# Altium PCB Rackmount_DSP.PcbDoc (part 7 of 24)
Units mil, origin at the board's own origin, x right, y up, seen from the top; angles counter-clockwise.
Board outline 10629.92 x 8267.72 mil, 4 copper layers (Top Layer, Mid Layer 1, Mid Layer 2, Bottom Layer), stack 36.2 mil thick; 4500 components, 1565 nets, 9765 pads, 3289 vias.
Unrouted connection lines stored in the file: 1.
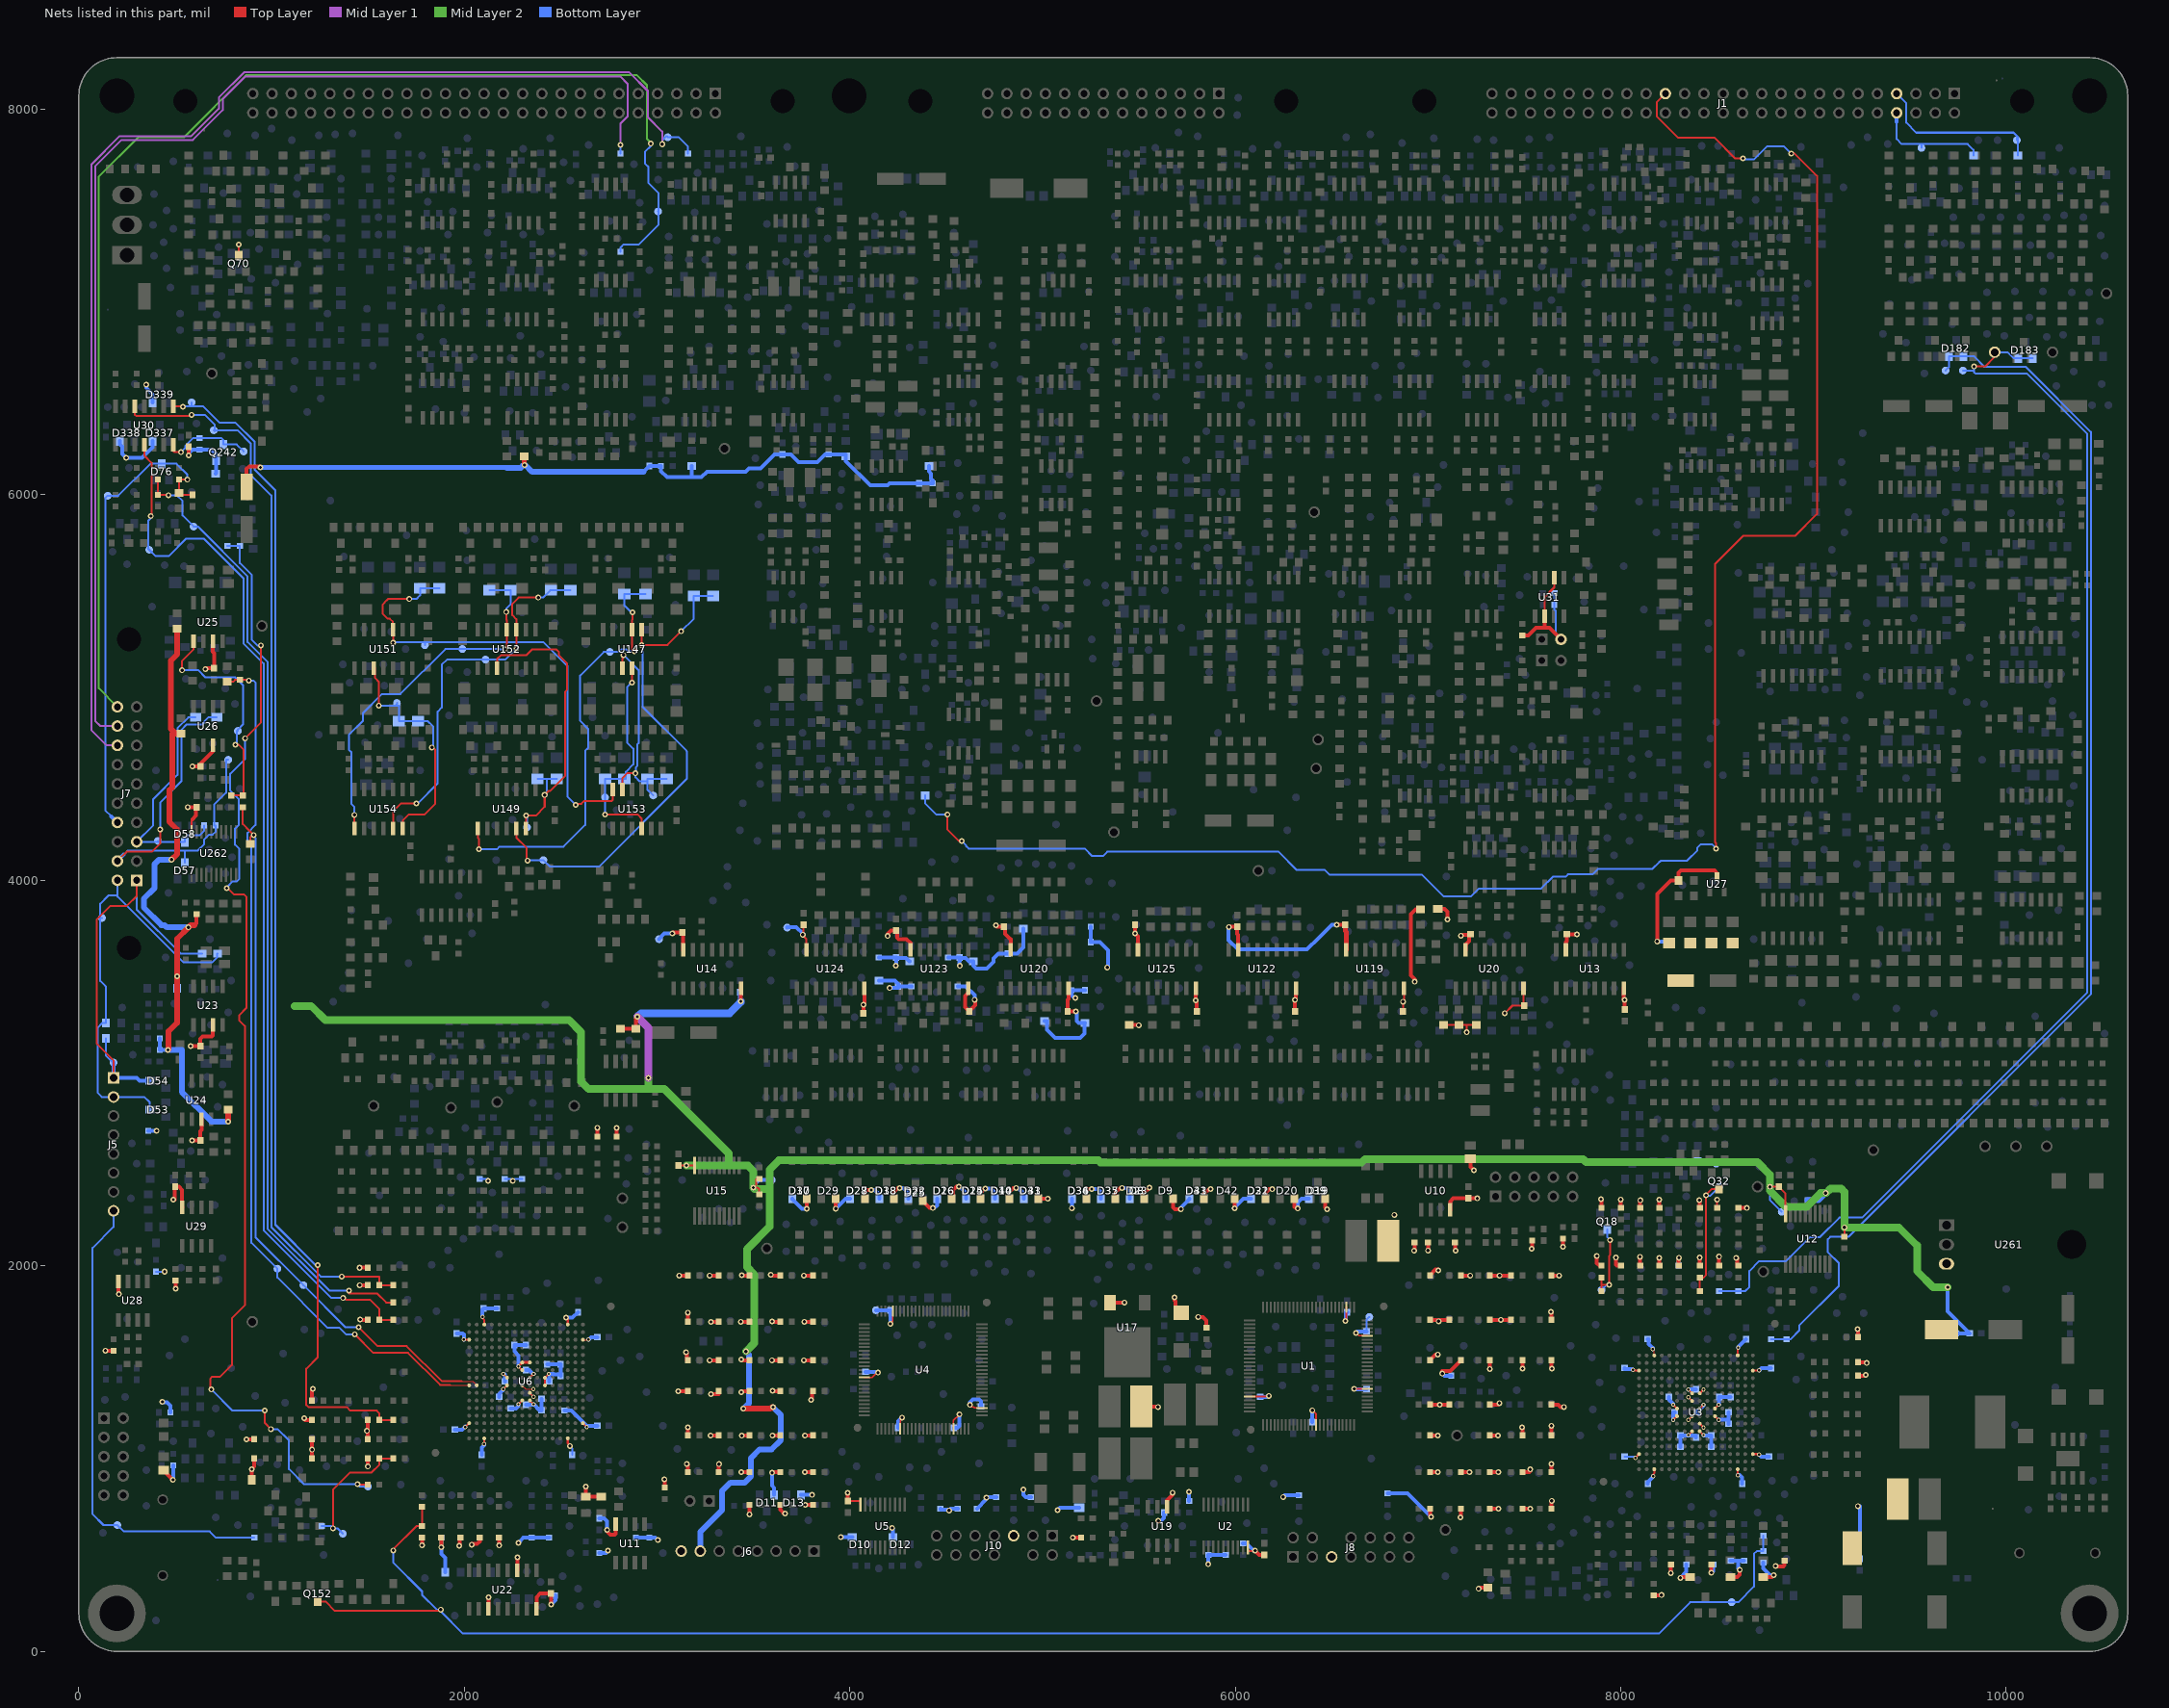
[diagram p9: the nets of this part, all layers, seen from the top]

## Via types
v1: diameter 30, hole 16, Top Layer to Bottom Layer, 3143 vias
v2: diameter 22, hole 12, Top Layer to Bottom Layer, 146 vias

## Nets (pads, with @x,y where several pads share a name; then routed paths per layer and width w, separated by ;. In a path a pad name is that pad's centre, name@x,y a point inside that pad or via, vN(x,y) a via of type N, cw(c..) or ccw(c..) an arc to the next point about the centre after c; other vN are vias at no path point) (continued)
+3.3V: C22.1 C23.1 C24.1 C25.1 C27.1 C28.1 C29.1 C220.1 C225.1 C226.1 C227.1 C228.1 C229.1 C230.1 C231.1 C232.1 C238.1 C239.1 C243.1 C244.1 C245.1 C246.1 C250.1 C256.1 C257.1 C259.1 C260.1 C261.1 C262.1 C263.1 C264.1 C265.1 C266.1 C267.1 C268.1 C269.1 C270.1 C271.1 C272.1 C273.1 C274.1 C275.1 C279.1 C280.1 C281.1 C282.1 C284.1 C285.1 C286.1 C287.1 C291.1 C292.1 C293.1 C295.1 C298.1 C299.1 C303.1 C306.1 C307.1 C498.1 C1145.1 D4.1 D8.2 D9.2 D10.2 D11.2 D12.2 D13.2 D14.2 D15.2 D16.2 D17.2 D18.2 D19.2 D20.2 D21.2 D22.2 D23.2 D24.2 D25.2 D26.2 D27.2 D28.2 D29.2 D30.2 D31.2 D32.2 D33.2 D34.2 D35.2 D36.2 D37.2 D38.2 D39.2 D40.2 D41.2 D42.2 D43.2 D47.2 D48.2 D51.2 D52.2 D67.2 D68.2 J6.8 J8.5 J10.5 L1.1 L5.1 L6.2 L7.1 L8.1 L9.1 R19.1 R21.1 R22.1 R23.1 R24.1 R26.2 R27.2 R28.2 R29.2 R30.2 R31.2 R32.2 R33.2 R34.2 R35.2 R36.2 R37.2 R38.2 R39.2 R40.2 R41.2 R42.2 R43.2 R44.2 R45.2 R46.2 R47.2 R48.2 R49.2 R50.2 R51.2 R52.2 R53.2 R54.2 R55.2 R56.2 R57.2 R58.2 R59.2 R60.2 R627.1 R629.1 R630.1 R631.2 R633.1 R634.1 R661.1 R662.1 R663.1 R664.2 R665.1 R666.1 R667.1 R668.2 R669.2 R670.2 R671.2 R672.1 R673.2 R674.1 R675.2 R678.1 R679.2 R681.1 R682.2 R683.1 R684.1 R685.2 R686.1 R687.2 R688.2 R689.1 R691.1 R692.2 R693.2 R694.1 R703.1 R704.1 R705.2 R708.2 R709.2 R710.2 R712.1 R714.2 R715.1 R716.1 R718.1 R719.2 R720.2 R721.1 R722.1 R723.1 R724.1 R725.2 R727.1 R731.2 R732.2 R739.2 R740.1 R741.2 R744.1 R745.1 R746.1 R747.2 R748.1 R749.1 R750.1 R752.2 R754.1 R756.2 R757.1 R758.2 R759.1 R764.1 R765.1 R766.1 R767.1 R768.1 R769.1 R770.1 R771.1 R772.1 R773.1 R774.1 R775.1 R776.1 R777.1 R778.1 R779.1 R780.1 R781.1 R783.1 R784.1 R785.1 R786.1 R787.1 R788.1 R789.1 R790.1 R791.1 R792.1 R793.1 R841.1 R842.1 R843.1 R844.1 R855.1 R856.1 R857.1 R864.2 R865.2 R866.1 R869.1 R1345.1 R2720.1 R3009.2 R3010.2 R3015.2 R3016.2 TP1731.1 TP1757.1 U1.3 U1.46 U1.65 U1.82 U1.96 U2.20 U3.A3 U3.A14 U3.C1 U3.C16 U3.F8 U3.F9 U3.H6 U3.H8 U3.H10 U3.H11 U3.J6 U3.J7 U3.J9 U3.J11 U3.L8 U3.L9 U3.P1 U3.P16 U3.T3 U3.T14 U4.3 U4.46 U4.65 U4.82 U4.96 U5.20 U6.A3 U6.A14 U6.C1 U6.C16 U6.F8 U6.F9 U6.H6 U6.H8 U6.H10 U6.H11 U6.J6 U6.J7 U6.J9 U6.J11 U6.L8 U6.L9 U6.P1 U6.P16 U6.T3 U6.T14 U10.8 U11.8 U17.3 U19.2 U22.3 U22.11 U22.16 U28.8 U29.8 | length 22248
  Top Layer w6: U6.J9@2300.32,1380.32 2300.32,1379.31 2319,1360.63 v2(2358.18,1360.63) ; U6.A3@2615.28,1616.54 2634.28,1616.54 2634.66,1616.92 v2(2644.64,1616.92) ; v2(8166.59,1567.37) 8165.83,1567.37 8168.99,1570.53 8173.46,1566.05 U3.P1@8173.46,1535.28
  Top Layer w9: U4.65@4074.88,1420.63 4114.01,1420.63 4139.14,1445.76 v1(4145.87,1445.76) ; v1(4210,1699.39) 4222.52,1711.91 U4.46@4222.52,1765.12 ; U4.82@4261.89,1154.88 4261.89,1203.72 v1(4271.02,1212.85) ; U4.96@4537.48,1154.88 4537.48,1197.5 v1(4569.01,1229.03) ; v1(4622.45,1278.29) 4622.45,1272.02 4626.67,1267.79 4642.7,1267.79 4647.35,1263.15 U4.3@4685.12,1263.15 ; U1.46@6074.88,1322.52 6170.62,1322.52 v1(6173.51,1325.4) ; v1(6399.7,1250.26) 6419.37,1230.59 U1.65@6419.37,1174.88 ; v1(6570.51,1713.86) 6576.85,1720.2 U1.3@6576.85,1785.12 ; v1(6616.93,1361.89) U1.82@6685.12,1361.89 ; v1(6626.41,1652.01) 6640.94,1637.48 U1.96@6685.12,1637.48
  Top Layer w10: v2(1997.33,1616.91) 2003.35,1616.91 2003.72,1616.54 U6.T3@2024.72,1616.54 ; v2(2005.04,1163.78) U6.T14@2024.72,1183.46 ; v2(2093.81,1735.91) 2093.81,1728.1 2103.46,1718.44 U6.P1@2103.46,1695.28 ; v2(2102.68,1076.2) 2102.68,1082.94 2103.46,1083.72 U6.P16@2103.46,1104.72 ; v2(2201.89,1360.63) U6.L9@2221.57,1380.32 ; v2(2201.89,1439.37) U6.L8@2221.57,1419.68 ; v2(2280.63,1281.89) U6.J11@2300.32,1301.57 ; v2(2280.63,1478.74) U6.J7@2300.32,1459.06 ; U6.H11@2339.68,1301.57 v2(2359.37,1281.89) ; U6.H10@2339.68,1340.94 v2(2359.37,1321.26) ; U6.H8@2339.68,1419.68 v2(2359.37,1439.37) ; U6.F9@2418.43,1380.32 U6.F8@2418.43,1419.68 v2(2438.11,1439.37) ; v1(2527.69,1731.43) 2536.54,1722.58 U6.C1@2536.54,1695.28 ; U6.A14@2615.28,1183.46 v2(2634.96,1163.78) ; C246.1@3990,780 4054.84,780 U5.20@4054.84,761.61 ; U2.20@6065.16,538.39 6065.16,519.11 6102.46,519.11 v1(6102.46,522.08) ; v1(7897.6,2345.88) v1@7900,2345.88 ; v2(8062.85,1461.16) 8069.1,1461.16 8073.72,1456.54 U3.T3@8094.72,1456.54 ; v2(8075.04,1003.78) U3.T14@8094.72,1023.46 ; v2(8167.38,909.5) 8169.79,911.92 8169.79,920.05 8173.46,923.72 U3.P16@8173.46,944.72 ; v2(8271.89,1200.63) U3.L9@8291.57,1220.32 ; v2(8271.89,1279.37) U3.L8@8291.57,1259.68 ; v2(8350.63,1121.89) U3.J11@8370.32,1141.57 ; v2(8350.63,1200.63) U3.J9@8370.32,1220.32 ; v2(8350.63,1318.74) U3.J7@8370.32,1299.06 ; v2(8350.63,1358.11) U3.J6@8370.32,1338.43 ; v1@8406.56,2340.27 v1(8407.83,2340.27) ; U3.H11@8409.68,1141.57 v2(8429.37,1121.89) ; U3.H10@8409.68,1180.94 v2(8429.37,1161.26) ; U3.H8@8409.68,1259.68 v2(8429.37,1279.37) ; U3.H6@8409.68,1338.43 v2(8429.37,1358.11) ; U3.F9@8488.43,1220.32 v2(8508.11,1200.63) ; U3.F8@8488.43,1259.68 v2(8508.11,1279.37) ; R720.2@8500,2300 v1(8500,2343.54) ; U3.C16@8606.54,944.72 8606.54,923.72 8606.94,923.32 v2(8606.94,914.42) ; U3.C1@8606.54,1535.28 8606.54,1575.14 v2(8609.22,1575.14) ; U3.A14@8685.28,1023.46 8706.28,1023.46 8709.4,1020.34 v2(8717.68,1020.34) ; U3.A3@8685.28,1456.54 8706.28,1456.54 8707.41,1457.67 v2(8717.92,1457.67)
  Top Layer w12: U6.C16@2536.54,1104.72 2536.54,1080.17 2540.78,1075.92 v1@2542.99,1075.92 ; v1@2542.99,1075.93 2547.28,1071.64 v1(2547.28,1065.82)
  Top Layer w15: v2(2280.63,1478.74) U6.J6@2300.32,1498.43 U6.H6@2339.68,1498.43
  Top Layer w20: v1(138.39,1560) R633.1@180,1560 ; U28.8@205,1920 205,1852.65 v1(207.57,1852.65) ; L8.1@440,940.5 440,938.42 487.92,890.5 v1(488.44,889.98) ; v1(489.88,2343.7) 497.7,2343.7 497.7,2410 C282.1@500,2410 519.92,2410 535.61,2394.31 535.61,2305.13 U29.8@536.63,2304.11 ; v1(501.63,1881.7) R634.1@501.63,1924.11 ; 600.55,3767.93 610,3777.38 R2720.1@610,3825 ; v1(869.36,1100.01) R678.1@910,1100 ; D48.2@896.5,890 v1(896.5,945.08) 910,958.58 R630.1@910,1000 ; v1(1169.34,1209.88) 1169.34,1205.66 1175,1200 R744.1@1210,1200 ; R694.1@1210,1000 v1(1210,1046.17) R740.1@1210,1100 ; R745.1@1210,1300 1210,1357.86 v1(1214.39,1362.25) ; v1(1455.98,1990) R727.1@1500,1990 ; v1(1457.44,1900) R665.1@1500,1900 ; v1(1459.64,1721) 1460.64,1720 R666.1@1500,1720 ; v1(1499.83,958.7) 1500,958.88 R721.1@1500,1000 ; R754.1@1500,1100 1500,1138.37 v1(1494.7,1143.67) 1500,1148.97 R667.1@1500,1200 ; v1(1780,549.79) R674.1@1780,590 ; v1(1880,539.98) R723.1@1880,590 ; v1(1973.78,547.46) 1973.78,554.04 1974.67,554.94 1974.67,590 R672.1@1980,590 ; v1(2038.21,553.57) 2038.21,556.96 2066.46,556.96 2080,570.51 R686.1@2080,590 ; U22.11@2125,220 v1(2125,280.95) ; v1(2180,549.15) R684.1@2180,590 ; U22.3@2275,420 v1(2275,487.5) ; U22.16@2375,220 2375,281.1 2393.9,300 C299.1@2450,300 2450.45,299.55 v1(2450.45,242.79) ; v1(2630,855.5) D68.2@2630,803.5 D52.2@2710,803.5 ; R683.1@2690,2670 v1(2690,2716.64) ; v1(2741.24,629.88) 2741.24,621.75 2757.63,605.35 2779.4,605.35 2785,610.95 U11.8@2785,660 ; R661.1@2790,2670 v1(2790,2715.9) ; v1(3038.5,891.84) 3040,890.34 R712.1@3040,850 ; v1(3109.91,1350) R779.1@3160,1350 ; v1(3114.55,1950) R792.1@3160,1950 ; v1(3150.89,1551.12) 3150.89,1550.19 3155,1546.08 3155,1510 R780.1@3160,1510 ; v1(3153.76,972.52) 3153.76,972.24 3160,966 R785.1@3160,930 ; R769.1@3160,1120 v1(3160,1162.21) ; R842.1@3160,1710 v1(3160,1757.36) ; v1(3272.87,1950) R786.1@3320,1950 ; v1(3273.22,1510) R783.1@3320,1510 ; v1(3278.04,1120) R855.1@3320,1120 ; v1(3279.16,1334.75) 3318.62,1334.75 3320,1336.13 R767.1@3320,1350 ; v1(3279.78,1708.99) 3280.79,1710 R788.1@3320,1710 ; R857.1@3320,930 3320,970.03 v1(3321.01,971.04) ; v1(3435.02,1710) R791.1@3480,1710 ; v1(3436.44,1345.02) 3435.82,1345.02 3435.82,1350 R775.1@3480,1350 ; v1(3436.65,930) R781.1@3480,930 ; v1(3436.87,1513.62) 3440.49,1510 R776.1@3480,1510 ; v1(3439.7,1950.96) 3440.66,1950 R841.1@3480,1950 ; v1(3439.94,1118.76) 3441.18,1120 R766.1@3480,1120 ; v1(3480,710.89) R774.1@3480,760 ; v1(3590.36,1954.37) 3594.73,1950 R790.1@3640,1950 ; v1(3595.96,1510) R773.1@3640,1510 ; v1(3596.45,926.19) 3600.26,930 R768.1@3640,930 ; v1(3597.26,1711.38) 3598.64,1710 R784.1@3640,1710 ; v1(3597.98,1120) R856.1@3640,1120 ; v1(3599.47,1352.07) 3601.54,1350 R777.1@3640,1350 ; R789.1@3640,760 3640,734.11 3655.37,718.73 3663.65,718.73 v1(3663.65,715.39) ; v1(3761.02,1510) R770.1@3810,1510 ; v1(3761.44,1950) R778.1@3810,1950 ; v1(3763.38,1710) R787.1@3810,1710 ; v1(3767.22,930) R771.1@3810,930 ; v1(3767.59,1120) R765.1@3810,1120 ; v1(3769.05,759.56) 3769.48,760 R793.1@3810,760 ; v1(3775.9,2295.33) 3777.5,2296.94 D30.2@3777.5,2348.5 ; v1(3799.22,1304.41) 3799.22,1308.22 3805,1314 3805,1350 R772.1@3810,1350 ; v1(3927.5,2296.8) D29.2@3927.5,2348.5 ; v1(3989.34,823.02) 3989.34,818.16 3990,817.5 C246.1@3990,780 ; D28.2@4077.5,2348.5 4077.5,2380.98 4090.01,2393.49 v1(4111.59,2393.49) ; D18.2@4227.5,2348.5 4227.5,2380.92 4249.59,2403.01 v1(4259.19,2403.01) ; D25.2@4377.5,2338.5 4377.5,2335 4412.77,2299.73 v1(4430.6,2299.73) ; D16.2@4527.5,2348.5 4527.5,2352 4535.84,2360.34 4535.84,2393.27 4553.27,2410.7 v1(4565.02,2410.7) ; D24.2@4677.5,2348.5 4677.5,2378.37 4699.21,2400.08 v1(4702.37,2400.08) ; D14.2@4827.5,2348.5 4827.5,2383.87 4848.11,2404.48 v1(4862.79,2404.48) ; D41.2@4977.5,2348.5 v1(5026.9,2348.5) ; v1(5156.77,590) R663.1@5200,590 ; D36.2@5227.5,2348.5 5227.5,2390.42 5235.36,2398.28 v1(5255.52,2398.28) ; U17.3@5350,1810.1 v1(5425.08,1810.1) ; D37.2@5377.5,2348.5 5377.5,2379.69 5401.95,2404.14 v1(5412.28,2404.14) ; L5.1@5512.68,1270 5596.29,1270 v1(5598.45,1267.84) ; D23.2@5527.5,2348.5 5527.5,2377.52 5555.35,2405.38 v1(5555.12,2405.61) ; U19.2@5645,750 5645,781.41 5674.91,811.32 v1(5674.91,823.33) ; D9.2@5677.5,2348.5 5677.5,2303.88 5687.11,2294.27 v1(5718.11,2294.27) ; v1(5685.3,1837.06) 5685.3,1820.57 5690,1815.87 5690,1757.5 D4.1@5720,1757.5 ; v1(5807.76,1734.97) 5831.08,1734.97 5850,1716.06 R865.2@5850,1680 ; D43.2@5837.5,2348.5 5837.5,2372.6 5863.55,2398.65 v1(5871.96,2398.65) ; v1(5997.5,2298.29) D42.2@5997.5,2348.5 ; v1(6102.46,522.08) 6124.54,500 C303.1@6150,500 ; D21.2@6157.5,2348.5 6157.5,2378.96 6176.09,2397.55 v1(6190.97,2397.55) ; D20.2@6307.5,2348.5 6307.5,2305 6315.3,2297.2 v1(6323.92,2297.2) ; D19.2@6467.5,2348.5 6467.5,2302.69 v1(6476.65,2293.53) ; v1(6927.54,2079.32) 6930,2081.78 R58.2@6930,2120 ; v1(7000,2079.84) R59.2@7000,2120 ; R60.2@7010,740 7010,703.02 v1(7015.26,697.76) ; R42.2@7010,930 v1(7051.24,930) ; R32.2@7010,1120 v1(7051.13,1120) ; R35.2@7010,1280 v1(7060.21,1280) R46.2@7110,1280 ; R50.2@7010,1510 7010,1511 7039.14,1540.14 7049.93,1540.14 v1(7050.07,1540) ; R51.2@7010,1720 v1@7057.37,1720 ; R41.2@7010,1950 7010,1951 7039.14,1980.14 7049.51,1980.14 v1(7053.05,1976.6) ; v1(7054.78,1712.51) 7057.39,1712.51 7057.39,1720.02 R54.2@7110,1720 ; v1(7074.02,1440.91) 7074.02,1454.31 7115.31,1454.31 7170,1509 R53.2@7170,1510 ; U10.8@7115,2290 7115,2333.75 7131.25,2350 C292.1@7210,2350 v1(7255.43,2350) ; R752.2@7140,2120 7140,2082.01 v1(7143.04,2078.97) ; v1(7168.64,694.67) 7170,696.03 R27.2@7170,740 ; R30.2@7170,930 v1(7214.63,930) ; R40.2@7170,1950 v1(7218.96,1950) ; L7.1@7220,2555.5 7220,2513.5 v1(7238.42,2495.14) v1(7238.42,2495.14) ; v1(7261.78,324.58) 7267.19,330 R864.2@7310,330 ; R28.2@7320,740 v1(7364.74,740) ; R43.2@7320,930 v1(7364.39,930) ; R45.2@7320,1120 v1(7362.32,1120) ; R36.2@7320,1280 7363.12,1280 v1(7371.07,1287.96) ; v1(7320,1465.38) R49.2@7320,1510 ; R39.2@7320,1720 v1(7377.78,1720) R52.2@7430,1720 ; R57.2@7320,1950 v1(7371.44,1950) R56.2@7430,1950 ; v1(7487.25,1162.19) 7490,1159.44 R33.2@7490,1120 ; R26.2@7490,740 v1(7530.65,740) ; R31.2@7490,930 7525,930 7530.2,935.2 v1(7530.2,943.84) ; v1(7490,1467.46) R48.2@7490,1510 ; v1(7537.64,2088.72) 7540,2091.08 R748.1@7540,2130 ; v1(7638.33,1761.14) 7640,1759.47 R38.2@7640,1720 ; R29.2@7640,740 7640,779.21 v1(7641.85,781.06) ; R44.2@7640,930 v1(7640,971.79) ; R34.2@7640,1120 v1(7640,1170.49) ; R47.2@7640,1280 7675.93,1280 7688.16,1267.77 v1(7704.48,1267.77) ; R37.2@7640,1510 7640,1468.94 v1(7642.35,1466.59) ; R55.2@7640,1950 7680.61,1950 v1(7680.68,1949.93) ; v1(7700,2099.02) R704.1@7700,2140 ; v1(7875.86,2051.36) 7875.86,2014.71 7890.56,2000 R725.2@7900,2000 ; R732.2@7900,2300 v1@7900,2345.88 ; v1(7974.51,2042.82) 7974.51,2042.34 7975.23,2041.63 7975.23,2005.56 7980.79,2000 R669.2@8000,2000 ; R670.2@8000,2300 v1(8000,2344.49) ; R671.2@8100,2000 v1(8100,2047.28) ; R668.2@8100,2300 8100,2340.04 v1(8100.97,2340.04) ; R688.2@8170,290 8208.94,290 v1(8211.06,292.12) ; R664.2@8200,2000 v1(8200,2041.6) ; R756.2@8200,2300 v1(8200,2344.03) ; v1(8260,406.2) R682.2@8260,450 ; R709.2@8300,2000 8300,2039.53 v1(8302.62,2042.15) ; v1(8308.97,381.51) 8313.95,386.5 D67.2@8360,386.5 ; v1@8406.56,2340.27 8410,2336.83 R708.2@8410,2300 ; R741.2@8410,2000 v1(8410,2042.73) ; v1(8470,407.91) R679.2@8470,450 ; R705.2@8510,2000 v1(8510,2047.82) ; D51.2@8570,386.5 8605.25,386.5 8617.58,398.82 v1(8617.58,422.8) ; v1(8598.29,2040.98) 8598.29,2040.16 8603.45,2035 8603.45,2000 R692.2@8610,2000 ; R719.2@8610,2300 v1(8654.76,2300) ; D47.2@8740,386.5 8783.49,386.5 v1(8792.71,395.72) ; v1(8802.74,442.49) 8804.38,440.86 8843.02,440.86 8850,447.84 R693.2@8850,470 ; v1(9228.47,1671.11) 9230,1669.58 R710.2@9230,1630 ; R747.2@9230,1430 9266.31,1430 v1(9271,1434.69) ; R758.2@9230,1500 9271.49,1500 v1(9275.55,1495.94)
  Top Layer w30: v1(462.53,3120) 464.86,3122.33 464.86,3216.27 509.73,3261.13 v1@509.73,3502.36 ; v1(481.04,4107.33) 509.77,4136.06 509.77,4263.84 470.11,4303.5 470.11,4467.86 485.4,4483.15 485.4,4760 502.74,4760 ; v1(510,3502.36) v1@509.73,3502.36 ; R3016.2@510,5305 510,5172.06 478.28,5140.34 478.28,4785.04 502.74,4760.58 502.74,4760 ; R3015.2@530,4760 502.74,4760 ; 600.55,3767.93 580.48,3767.93 v1(568.52,3755.98) 509.73,3697.18 v1@509.73,3502.36 ; v1(775,2748.41) R3009.2@775,2810
  Bottom Layer w9: v1@6167.4,1325.4 v1(6173.51,1325.4)
  Bottom Layer w10: R631.2@400,1970 v1(444.62,1970) ; R724.1@2080,2450 2123.04,2450 v1(2123.04,2440.27) ; v2(2093.81,1735.91) v2@2094.14,1736.24 ; R722.1@2210,2450 2242.37,2450 v1(2251.41,2440.96) 2260.46,2450 R757.1@2300,2450 ; v1(2547.28,1065.82) 2560,1053.09 C268.1@2560,1020 ; C24.1@6680,1660 6680,1720 TP1757.1@6695,1735 ; C238.1@8020,1010 8068.82,1010 v2(8075.04,1003.78)
  Bottom Layer w20: R866.1@420,3180 R869.1@420,3120 v1(462.53,3120) ; v1(433.5,1294.81) 433.5,1292.45 457.06,1292.45 475,1274.52 R749.1@475,1240 ; v1(488.44,889.98) 490,891.54 R691.1@490,965 ; R703.1@1880,590 v1(1880,539.98) 1880,504.98 1900,484.98 R1345.1@1900,410 ; C285.1@1950,1150 1987.5,1150 2005.04,1167.54 v2(2005.04,1163.78) ; C287.1@1960,1650 1991.39,1650 1997.33,1644.06 v2(1997.33,1616.91) ; C269.1@2090,1020 2090,1057.5 2102.68,1070.18 v2(2102.68,1076.2) ; v2@2094.14,1736.24 2094.14,1774.14 C274.1@2100,1780 R662.1@2170,1780 ; C279.1@2180,1320 2180,1333.89 2201.75,1355.64 2201.75,1360.49 v2(2201.89,1360.63) ; v2(2201.89,1439.37) 2206.63,1439.37 2210,1436 C266.1@2210,1400 ; C272.1@2240,1260 2240,1259.36 2266.98,1259.36 2280.63,1273.01 v2(2280.63,1281.89) ; v1(2280,563.28) 2306.72,590 R681.1@2350,590 R689.1@2440,590 ; v2(2280.63,1478.74) 2280.63,1535.3 2260,1555.93 C271.1@2260,1590 C273.1@2320,1590 ; C244.1@2320,1280 2357.48,1280 v2(2359.37,1281.89) 2391.26,1250 C239.1@2400,1250 C280.1@2400,1310 ; C270.1@2320,1460 2334.65,1460 2355.28,1439.37 v2(2359.37,1439.37) ; C306.1@2430,1490 C307.1@2500,1490 C250.1@2500,1437.5 ; C245.1@2440,1400 2440,1437.48 v2(2438.11,1439.37) 2462.13,1439.37 2464,1437.5 C250.1@2500,1437.5 ; v1(2450.45,242.79) 2472.26,264.6 2472.26,290 R764.1@2470,290 ; C250.1@2500,1430 C250.1@2500,1437.5 ; R714.2@2520,1250 2556,1250 2633.52,1172.48 2633.52,1165.22 v2(2634.96,1163.78) 2641.18,1170 C284.1@2690,1170 ; v1(2527.69,1731.43) 2561.43,1731.43 C286.1@2590,1760 ; v2(2644.64,1616.92) 2657.3,1629.57 2690,1629.57 C293.1@2690,1630 ; R750.1@2700,510 2736,510 2745.51,519.51 v1(2745.51,522.22) ; C243.1@2700,690 2725.59,690 2741.24,674.36 v1(2741.24,629.88) ; R843.1@2890,590 R844.1@2960,590 2989.43,590 3001.99,577.44 v1(3003.67,577.44) ; v1(3596.45,926.19) 3596.45,859.67 3607.5,848.62 D11.2@3607.5,811.5 ; D17.2@3702.5,2348.5 3702.5,2345.54 3752.71,2295.33 v1(3775.9,2295.33) ; D13.2@3747.5,811.5 v1(3804.41,811.5) ; v1(3927.5,2296.8) 3930.2,2299.5 3930.62,2299.5 3930.62,2300.27 3978.85,2348.5 D27.2@4002.5,2348.5 ; v1(3952.9,592.5) D10.2@4013.5,592.5 ; C225.1@4080,1450 4141.63,1450 v1(4145.87,1445.76) ; v1(4111.59,2393.49) 4128.7,2393.49 4152.5,2369.69 D38.2@4152.5,2348.5 ; TP1731.1@4135,1770 C29.1@4210,1770 v1(4210,1699.39) ; v1(4219.44,640.04) 4223.5,635.98 D12.2@4223.5,592.5 ; C267.1@4250,1160 4250,1194.95 4267.9,1212.85 v1(4271.02,1212.85) ; v1(4259.19,2403.01) 4279.24,2403.01 4302.5,2379.76 D22.2@4302.5,2348.5 ; v1(4430.6,2299.73) 4438.21,2299.73 4452.5,2314.01 D26.2@4452.5,2348.5 ; R629.1@4470,740 4470,735 4506,735 4510.13,730.87 v1(4514.79,730.87) 4514.87,730.87 4524,740 R627.1@4560,740 ; C28.1@4540,1160 4558.41,1160 4569.01,1170.6 v1(4569.01,1229.03) ; v1(4565.02,2410.7) 4569.91,2410.7 4602.5,2378.11 D15.2@4602.5,2348.5 ; v1(4622.45,1278.29) 4622.45,1292.11 4637.43,1307.09 4669.84,1307.09 4680,1296.93 C27.1@4680,1270 ; R715.1@4660,740 4709,789 v1(4709,797.07) 4711.93,800 R716.1@4760,800 ; v1(4702.37,2400.08) 4734.31,2400.08 4752.5,2381.89 D40.2@4752.5,2348.5 ; v1(4862.79,2404.48) 4872.78,2404.48 4902.5,2374.76 D33.2@4902.5,2348.5 ; v1(4901.1,838.9) 4901.1,811.84 4912.94,800 R718.1@4940,800 ; v1(5077.39,732.97) 5089.92,745.5 L9.1@5190,745.5 ; v1(5151.42,2299.64) 5152.5,2300.72 D34.2@5152.5,2348.5 ; v1(5255.52,2398.28) 5287.43,2398.28 5302.5,2383.21 D35.2@5302.5,2348.5 ; v1(5412.28,2404.14) 5433.58,2404.14 5452.5,2385.23 D8.2@5452.5,2348.5 ; v1(5600.7,676.97) 5614.15,676.97 5630,692.82 C498.1@5630,720 ; v1(5718.11,2294.27) 5718.11,2300.61 5762.5,2345 D31.2@5762.5,2348.5 ; R759.1@5760,780 v1(5760,827.68) ; v1(5860,451.59) R21.1@5860,500 R22.1@5950,500 ; v1(5997.5,2298.29) 5992.29,2298.29 6042.5,2348.5 D32.2@6082.5,2348.5 ; R23.1@6040,560 6057.51,560 6095.42,522.08 v1(6102.46,522.08) ; C23.1@6130,1320 6162,1320 v1@6167.4,1325.4 ; v1(6247.89,800.71) 6257.18,810 R19.1@6330,810 ; v1(6323.92,2297.2) 6323.92,2329.25 6343.17,2348.5 D39.2@6382.5,2348.5 ; v1(6399.7,1250.26) 6399.7,1227.8 6400,1227.5 C22.1@6400,1190 ; v1(6570.51,1713.86) 6574,1717.35 6574,1760 C25.1@6580,1760 ; v1(6616.93,1361.89) 6618.82,1360 C220.1@6680,1360 ; v1(6626.41,1652.01) 6634.4,1660 C24.1@6680,1660 ; R24.1@6790,820 6893.02,820 v1(7015.26,697.76) ; v1(7074.02,1440.91) 7084.93,1430 R746.1@7120,1430 ; C227.1@8020,1470 8020,1464 8060.01,1464 v2(8062.85,1461.16) ; C265.1@8140,870 8140,877.03 8167.38,904.41 v2(8167.38,909.5) ; C261.1@8140,1620 8145.73,1620 8145.73,1593.79 8165.83,1573.68 8165.83,1567.37 v2(8166.59,1567.37) ; C281.1@8250,1320 8250,1305.99 8271.89,1284.1 v2(8271.89,1279.37) ; v2(8271.89,1200.63) 8272.5,1201.24 8272.5,1240 C256.1@8280,1240 ; R739.2@8300,2000 8300,2039.53 v1(8302.62,2042.15) ; v1(8308.97,381.51) 8340,412.55 R685.2@8340,450 ; C231.1@8310,1060 C257.1@8310,1120 8348.74,1120 v2(8350.63,1121.89) 8354,1118.52 8390,1118.52 C263.1@8390,1110 ; v2(8350.63,1358.11) 8352.11,1358.11 8354,1360 C259.1@8390,1360 ; C262.1@8400,1240 8400,1245 8429.37,1274.37 v2(8429.37,1279.37) ; v2(8429.37,1121.89) 8431.26,1120 C226.1@8470,1120 C275.1@8470,1060 ; v1(8470,407.91) 8472.91,407.91 8480,415 R673.2@8480,450 ; v2(8508.11,1200.63) 8508.11,1200.96 8560,1200.96 ; v2(8508.11,1279.37) 8508.11,1280.61 8510,1282.5 C229.1@8510,1320 C232.1@8570,1320 ; C295.1@8560,1180 8560,1200.96 ; C291.1@8560,1240 8560,1200.96 ; R687.2@8570,470 8605.59,470 ; v2(8606.94,914.42) 8617.12,914.42 8630,901.55 C228.1@8630,870 ; v2(8609.22,1575.14) 8609.22,1579.22 C260.1@8650,1620 ; v1(8617.58,422.8) 8617.2,422.8 8609.67,430.33 8609.67,465.92 8605.59,470 ; R731.2@8640,470 8605.59,470 ; v2(8717.68,1020.34) 8728.01,1010 C264.1@8770,1010 ; v2(8717.92,1457.67) 8730.24,1470 C230.1@8780,1470 ; R675.2@8740,460 8740,429.91 8774.19,395.72 v1(8792.71,395.72) ; v1(9230,753.37) 9240.34,753.37 9240.34,480 C298.1@9240,480
  Bottom Layer w30: v1(462.53,3120) 534.13,3120 534.13,2901.86 687.58,2748.41 v1(775,2748.41) ; v1(481.04,4107.33) 415.67,4107.33 391.31,4082.98 391.31,3958.7 337.33,3904.72 337.33,3858.49 428.17,3767.66 444.96,3767.66 456.64,3755.98 v1(568.52,3755.98) ; R3010.2@510,3440 v1(510,3502.36)
  other v1: 6824.98,2264.36
+5V: C224.1 C241.1 C242.1 C289.1 C290.1 C619.1 C620.1 C626.2 C627.1 C633.1 C636.1 C641.1 C1030.1 C1082.1 C1083.1 C1100.1 C1111.1 C1147.1 C1148.2 C1149.2 C1150.2 C1151.2 C1152.2 C1153.2 C1154.2 C1155.2 C1156.2 C1174.1 C1175.2 D337.2 D338.2 D339.2 J6.7 Q70.3 Q242.2 R837.2 R838.2 R839.2 R840.2 R988.2 R1078.1 R1210.1 R1211.1 R1401.1 R1436.1 R1460.1 R1464.1 R1468.1 R2574.1 R2575.1 R2576.1 R2577.1 R2578.1 R2579.1 R2580.1 R2581.1 R2582.1 R2612.2 R2613.2 R2614.2 R2615.2 R2616.2 R2617.2 R2618.2 R2619.2 R2620.2 R2733.2 R2735.1 TP506.1 TP1732.1 TP1733.1 U12.20 U13.16 U14.16 U15.20 U20.16 U23.3 U24.3 U25.3 U26.3 U119.16 U120.16 U122.16 U123.16 U124.16 U125.16 U261.3 U262.20 | length 24778.3
  Top Layer w10: U262.20@584.84,4251.61 584.84,4313.37 588.97,4317.5 ; Q70.3@830,7241.5 v1(830,7298.44) ; C1082.1@3110,2520 v1(3151.64,2520) 3161.09,2520 3162.39,2521.3 U15.20@3194.84,2521.3 ; R839.2@3530,2370 3528.47,2370 3528.47,2400 3522.93,2405.55 v1(3499.04,2405.55) 3513.49,2420 3513.49,2450 R840.2@3530,2450 ; C620.1@6870,3320 v1(6870,3370.61) 6875,3375.61 U119.16@6875,3440 ; R1401.1@7080,3250 R1436.1@7160,3250 7200,3250 ; v1(7200,3211.64) 7200,3250 ; R1468.1@7250,3250 7200,3250 ; v1(7398.43,3310.66) 7437.77,3350 C1030.1@7495,3350 ; U20.16@7495,3440 C1030.1@7495,3350 ; C1030.1@7500,3350 C1030.1@7495,3350 ; v1(8773.56,2410) C1083.1@8820,2410 8820,2408.5 8854.84,2373.66 U12.20@8854.84,2271.3 ; R837.2@9160,2150 v1(9160,2199.69)
  Top Layer w20: v1(564.45,4380) C242.1@607.35,4380 ; v1(570,6204.09) C290.1@570,6250 ; v1(579.38,3140) C1175.2@630,3140 630,3177.5 642.5,3190 690,3190 695,3195 U23.3@695,3250 ; v1(587.39,2650) C1174.1@630,2650 630,2698.37 636.63,2705 U24.3@636.63,2760 ; v1(588.6,4591.81) 590.41,4590 590.41,4589.93 630,4589.93 C224.1@630,4590 630,4604.19 695,4669.19 U26.3@695,4700 ; 588.97,4317.5 607.35,4335.88 C242.1@607.35,4380 ; C242.1@610,4380 C242.1@607.35,4380 ; v1(656.46,5095.78) 656.46,5100 C241.1@700,5100 702.34,5100 702.34,5177.66 695,5185 U25.3@695,5240 ; C1111.1@870,6040.24 870,6134.77 883.46,6148.23 936.22,6148.23 v1(942.34,6142.1) ; R1211.1@2810,3230 R1210.1@2890,3230 2890,3284.52 v1(2897.38,3291.9) ; v1(3435,3372.09) U14.16@3435,3440 ; C641.1@4070,3310 v1(4070,3354.91) 4075,3359.91 U124.16@4075,3440 ; U123.16@4615,3440 4615,3416.64 4598.11,3399.75 4598.11,3341.89 C619.1@4620,3320 4620,3321.5 4650.14,3351.64 4650.14,3378.16 v1(4647.3,3381) ; U120.16@5135,3440 5135,3385 5130,3380 C636.1@5130,3320 v1(5172.5,3320) ; R1464.1@5450,3250 5497.01,3250 v1(5498.58,3248.43) ; U125.16@5795,3440 v1(5795,3377.6) 5800,3372.6 C627.1@5800,3320 ; C626.2@6310,3320 v1(6310,3380) 6315,3385 U122.16@6315,3440 ; v1(6931.5,3473.64) 6931.5,3486.57 6911.01,3507.06 6911.01,3824.07 6936.03,3849.09 R1078.1@6960,3849.09 ; U13.16@8015,3440 8015,3385 v1(8020,3380) C289.1@8020,3330
  Top Layer w25: R1460.1@2310,6200 2310,6154.73 v1(2312,6154.73)
  Top Layer w30: v1(3447.97,1259.08) 3587.72,1259.08 3595.73,1267.08 v1(3601.25,1267.08)
  Mid Layer 1 w40: v1(2897.38,3291.9) 2954.86,3234.42 v1(2954.86,2975.73)
  Mid Layer 2 w40: 1118.87,3348.3 1205.28,3348.3 1279.33,3274.25 2543.97,3274.25 2605.35,3212.87 2605.35,2956.45 2644.17,2917.63 2831.89,2917.63 2954.86,2917.63 ; v1(2954.86,2975.73) 2954.86,2917.63 ; v1(3151.64,2520) 3372.46,2520 ; v1(3461.09,1555.5) 3504.43,1598.84 3504.43,1954.94 3466.16,1993.22 3466.16,2086.36 3583.13,2203.34 3583.13,2399.03 ; v1(9696.49,1889.42) 9620.41,1889.42 9537,1972.83 9537,2104.97 9442.28,2199.69 v1(9160,2199.69) 9160,2383.03 9142.93,2400.1 9088.04,2400.1 9065.33,2377.39 v1(9062.65,2377.39) 9036.07,2377.39 8965.11,2306.43 8856.8,2306.43 8773.56,2389.68 v1(8773.56,2410) 8773.56,2472.44 8708.33,2537.67 7820.36,2537.67 7805.2,2552.83 6672.39,2552.83 6656.14,2536.58 5301.12,2536.58 5289.21,2548.5 3632.7,2548.5 3583.13,2498.93 3583.13,2399.03 ; 2954.86,2917.63 3037.29,2917.63 3372.46,2582.46 3372.46,2520 ; 3372.46,2520 3470.81,2520 3499.04,2491.77 v1(3499.04,2405.55) 3505.56,2399.03 3583.13,2399.03
  Bottom Layer w10: v1(8773.56,2410) 8773.56,2341.44 TP506.1@8835,2280
  Bottom Layer w20: D338.2@212.5,6278.5 212.5,6261.33 224.67,6249.15 224.67,6212.91 v1(246.15,6191.43) 327.2,6191.43 382.5,6246.73 D337.2@382.5,6278.5 ; v1(348.79,6572.12) 348.79,6555.71 382.5,6522 D339.2@382.5,6478.5 ; R988.2@360,2700 v1(403.64,2700) ; v1(570,6204.09) 570,6216 589,6235 R2735.1@625,6235 688.24,6235 712.5,6210.74 Q242.2@712.5,6178.5 712.5,6112.5 R2733.2@710,6110 ; 2221.41,6140.46 2221.41,6141.38 ; 2929.86,6118.36 2960,6148.5 C1150.2@2960,6150 R2576.1@3020,6150 3020,6123.12 3052.24,6090.88 3183.56,6090.88 ; R2614.2@3180,6150 3180,6094.44 3183.56,6090.88 ; C633.1@3430,3420 3430,3377.09 v1(3435,3372.09) ; v1(3499.04,2405.55) 3499.04,2415.06 3528.98,2445 TP1732.1@3595,2445 ; R2618.2@4150,3480 4233.1,3480 4250,3463.09 C1156.2@4250,3450 ; R2582.1@4150,3600 C1151.2@4240,3600 C1151.2@4240,3597.29 ; v1(4207.11,3441.22) 4212.18,3441.37 4214,3443.19 4250,3443.19 C1156.2@4250,3450 ; v1(4238.47,3557.01) 4240,3558.54 C1151.2@4240,3597.29 ; R2620.2@4310,3580 4307.5,3580 4290.21,3597.29 C1151.2@4240,3597.29 ; R2580.1@4320,3450 C1156.2@4250,3450 ; R2617.2@4410,6150 4410,6121.75 4421.56,6110.19 4421.56,6083.14 4430,6074.7 R2579.1@4430,6060 C1152.2@4360,6060 4205.97,6060 4194.93,6048.96 4106.12,6048.96 3980,6175.08 R2613.2@3980,6200 3980,6210 R2575.1@3890,6210 3871.68,6210 3831.61,6169.93 3733.11,6169.93 3693.04,6210 C1148.2@3650,6210 3610.12,6210 3537.92,6137.8 3476.92,6137.8 3458.46,6119.34 3258.68,6119.34 3230.21,6090.88 3183.56,6090.88 ; R2581.1@4510,3600 C1155.2@4569.79,3600 ; R2574.1@4560,3450 4601.65,3450 4647.3,3404.35 v1(4647.3,3381) ; v1(4570.5,3556.29) 4569.32,3557.47 4569.32,3580.68 4569.79,3581.15 C1155.2@4569.79,3600 ; R2616.2@4900,3750 4900,3652.52 4867.48,3620 C1149.2@4820,3620 4771.48,3620 4746,3594.52 4746,3576.72 4710.69,3541.41 4655,3541.41 4640,3556.41 R2619.2@4640,3580 4617.44,3580 4600.07,3597.37 4572.63,3597.37 C1155.2@4570,3600 C1155.2@4569.79,3600 ; R2612.2@5010,3270 5022.5,3270 5022.5,3224.31 5064.87,3181.94 5194.97,3181.94 5217.65,3204.62 R2615.2@5217.65,3260 ; v1(5170.46,3389.55) 5165.16,3389.55 5150,3404.71 R2577.1@5150,3430 C1153.2@5220,3430 ; v1(5172.5,3320) 5177.5,3315 5177.5,3270.64 5188.14,3260 R2615.2@5217.65,3260 ; R2615.2@5220,3260 R2615.2@5217.65,3260 ; R2578.1@5250,3760 C1154.2@5250,3680 5297.11,3680 5302.13,3674.98 5302.13,3674.35 5338.98,3637.5 5338.98,3553.23 5336.01,3553.23 v1(5336.01,3548.1) ; v1(9696.49,1889.42) 9696.49,1763.51 C1100.1@9810,1650 TP1733.1@9740,1650
  Bottom Layer w25: v1(942.34,6142.1) 979.84,6142.1 980.56,6141.38 2221.41,6141.38
  Bottom Layer w30: 2221.41,6140.46 2292.83,6140.46 2303.43,6151.06 2312,6151.06 v1(2312,6154.73) 2316.28,6154.73 2352.65,6118.36 2929.86,6118.36 ; J6.7@3223.94,520 3223.94,619.37 3336.62,732.05 3336.62,831.34 3380.86,875.58 3455.24,875.58 3485.83,906.17 3485.83,1001.87 3531.86,1047.91 3594.16,1047.91 3642.19,1095.94 3642.19,1226.14 v1(3601.25,1267.08) ; v1(3447.97,1259.08) 3476.87,1287.97 3476.87,1539.71 v1(3461.09,1555.5) ; R838.2@8970,2340 9025.05,2340 9062.44,2377.39 v1(9062.65,2377.39)
  Bottom Layer w40: v1(2897.38,3291.9) 2916.59,3311.11 3377.67,3311.11 3435,3368.44 v1(3435,3372.09)
+5V_CTRL: Q242.3 R2735.2 TP1885.1 U30.14 | length 479.1
  Top Layer w10: U30.14@490,6260 490,6226.67 495.7,6220.98 v1(530.17,6220.98)
  Bottom Layer w10: v1(530.17,6220.98) 551.38,6242.19 551.38,6252.38 594,6295 R2735.2@625,6295 738.37,6295 750,6283.37 Q242.3@750,6261.5 818.5,6261.5 TP1885.1@855,6225
+5V_CTRL_CPLD: R1045.2 R2725.2 R2726.1 TP969.1 | length 6045.9
  Top Layer w10: v1(687.59,1358.53) 680.94,1365.18 680.94,1413.77 691.87,1424.7 733.29,1424.7 794.07,1485.48 794.07,1728.76 861.55,1796.24 861.55,3244.23 831.19,3274.59 831.19,3299.61 868.96,3337.38 868.96,3914.7 856.54,3927.12 803.64,3927.12 770.99,3959.76 v1(766.94,3959.76) ; v1(862.87,4736.99) 945.05,4819.17 v1(945.05,5219.06) ; v1(964.31,1249.38) 964.31,1185.01 v1(996.1,1153.22) ; v1(1445.5,867.26) 1447.76,865 R1045.2@1500,865
  Bottom Layer w10: v1(687.59,1358.53) 796.74,1249.38 v1(964.31,1249.38) ; v1(766.94,3959.76) 766.94,3963.08 798.85,3994.99 819.72,3994.99 832.26,4007.52 832.26,4162.36 810.21,4184.41 810.21,4267.87 828.53,4286.2 828.53,4421.92 784.83,4465.63 784.83,4552.48 862.87,4630.53 v1(862.87,4736.99) ; R2725.2@770,5735 R2726.1@835,5735 835,5645.4 897.35,5583.04 897.35,5247.47 925.76,5219.06 v1(945.05,5219.06) ; v1(996.1,1153.22) 1031.28,1153.22 1090,1094.5 1090,945.5 1168.24,867.26 v1(1445.5,867.26) 1457.76,855 TP969.1@1500,855
-5V: C304.1 C305.1 C624.1 C625.1 C644.1 C646.1 C647.1 C649.1 C954.2 C965.1 D50.1 R2093.2 R2094.1 R2095.1 R2096.1 R2097.1 TP1646.1 TP1734.1 TP1735.1 U13.7 U14.7 U20.7 U27.3 U119.7 U120.7 U122.7 U123.7 U124.7 U125.7 | length 3164.1
  Top Layer w10: v1(3755.31,3717.74) v1@3751.76,3717.74 ; C649.1@3760,3770 3760,3725.99 v1@3751.76,3717.74 ; U124.7@3775,3640 3775,3694.5 v1@3751.76,3717.74
  Top Layer w20: v1(3078.8,3724.89) 3083.91,3730 C305.1@3130,3730 3135,3725 U14.7@3135,3640 ; v1(4196.01,3711.21) 4196.01,3723.05 4212.96,3740 C644.1@4240,3740 4246.72,3740 4246.72,3702.5 4254.14,3695.08 4284.71,3695.08 4285.44,3694.35 4294.56,3694.35 4315,3673.91 U123.7@4315,3640 ; v1(4758.17,3766.33) 4758.17,3765.83 4764,3760 C304.1@4800,3760 4806,3760 4806,3722.5 4833.5,3695 4835,3695 U120.7@4835,3640 ; C647.1@5480,3770 5480,3724.29 v1(5480.13,3724.16) 5495,3709.29 U125.7@5495,3640 ; v1(5967.18,3757.77) 5969.41,3760 C624.1@6010,3760 6010,3722.5 6015,3717.5 U122.7@6015,3640 ; v1(6526.8,3769.93) 6526.87,3770 C625.1@6570,3770 ; D50.1@7050,3852.59 7085.37,3852.59 7100.44,3837.52 7100.44,3797.27 v1(7100.08,3797.27) ; v1(7169.93,3713.21) 7174.93,3718.21 C646.1@7212.5,3718.21 ; U20.7@7195,3640 7195,3666.5 7212.5,3684 C646.1@7212.5,3718.21 ; U13.7@7715,3640 7715,3679 7720,3684 C965.1@7720,3720 v1(7772.71,3720) ; v1(8188.34,3683.18) 8188.34,3928.34 8260,4000 R2093.2@8300,4000 8300,4038.92 8312.19,4051.11 8486.73,4051.11 8500,4037.84 8500,4021.5 U27.3@8500,4018.66 ; C646.1@7212.5,3718.21 7212.5,3720 C646.1@7220,3720 7220,3718.21 C646.1@7212.5,3718.21
  Top Layer w25: C625.1@6570,3770 6570,3737.5 6575,3732.5 U119.7@6575,3640
  Bottom Layer w20: TP1646.1@3010,3695 3038.28,3723.28 3078.8,3723.28 v1(3078.8,3724.89) ; TP1735.1@3675,3755 3675,3758.03 3721.37,3758.03 3758.49,3720.91 v1(3755.31,3717.74) ; v1(5967.18,3757.77) 5964.91,3757.77 5964.91,3690.23 6014.23,3640.91 6370.75,3640.91 6432.93,3703.09 6433.38,3703.09 6500.23,3769.93 v1(6526.8,3769.93) ; v1(8188.34,3683.18) 8236.82,3683.18 TP1734.1@8245,3675
BAT_DISCHARGE_SCR_DRV: J1.7 R1150.2 TP323.1 | length 896.6
  Bottom Layer w10: J1.7@9431.5,8081.5 9480.92,8032.07 9480.92,7930.6 9532.52,7879 10037.74,7879 TP323.1@10060,7856.74 ; TP323.1@10055,7840 10055,7851.74 TP323.1@10060,7856.74 ; R1150.2@10060,7760 TP323.1@10060,7856.74
BAT_EARTH_SHORT: R1153.1 TP1655.1 | length 99.1
  Bottom Layer w10: R1153.1@8400,2540 8485,2540 TP1655.1@8495,2530
BAT_EARTH_SHORT_I: Q32.3 R741.1 R1010.2 TP509.1 | length 692
  Top Layer w10: R1010.2@8410,1870 R741.1@8410,1940 8430.12,1940 8442.53,1952.41 v1(8442.53,2365.91) 8442.53,2368.84 8472.2,2398.5 Q32.3@8510,2398.5
  Bottom Layer w10: v1(8442.53,2365.91) 8445.51,2362.93 8462.93,2362.93 TP509.1@8510,2410
BAT_SCR1: D182.1 D182.2 R1020.1 R2106.1 TP322.1 | length 6534.8
  Bottom Layer w10: R1020.1@8780,1620 R2106.1@8860,1620 8882.17,1620 8926.1,1663.93 8926.1,1691.24 9130.95,1896.09 9130.95,2014.34 9074.86,2070.44 9074.86,2138.21 9087.06,2150.41 9181.1,2150.41 10439.41,3408.72 10439.41,6325.59 10100.96,6664.04 9887.51,6664.04 9833.05,6718.5 D182.1@9777.5,6718.5 D182.2@9702.5,6718.5 9702.5,6662.5 TP322.1@9685,6645
BAT_SCR2: D183.1 D183.2 R1021.1 R2107.1 TP34.1 TP321.1 | length 6666.7
  Top Layer w10: v1(9832.94,6665.73) 9890.15,6665.73 9940,6715.58 TP34.1@9940,6740
  Bottom Layer w10: R1021.1@8510,1870 R2107.1@8610,1870 8646.59,1870 8667.05,1890.45 8667.05,1972.74 8718.52,2024.21 8857.35,2024.21 8982.46,2149.32 9033.69,2149.32 9134.58,2250.21 9252.62,2250.21 10418.62,3416.2 10418.62,6318.05 10108.71,6627.96 9841.26,6627.96 9832.94,6636.28 9832.94,6645 ; TP321.1@9775,6645 9832.94,6645 ; v1(9832.94,6665.73) 9832.94,6645 ; TP34.1@9940,6740 10007.48,6740 10038.98,6708.5 D183.2@10062.5,6708.5 D183.1@10137.5,6708.5
BATCOM: C1051.1 J17.2 R2342.1 R2379.2 TP507.1 U31.2 U31.6 | length 777
  Top Layer w10: U31.6@7605,5370 7605,5470 7655,5520 U31.2@7655,5570
  Top Layer w20: R2342.1@7490,5270 7520.16,5270 7559.89,5309.73 7604.1,5309.73 ; U31.6@7605,5370 7605,5310.63 7604.1,5309.73 ; J17.2@7690,5250 7630.27,5309.73 7604.1,5309.73
  Bottom Layer w10: C1051.1@7655,5490 R2379.2@7655,5430 7655,5403.71 7662.78,5395.92 7662.78,5282.22 TP507.1@7690,5255 J17.2@7690,5250
BP_FB_ACTION: R721.2 R1032.2 R2098.1 TP510.1 | length 723.7
  Top Layer w10: v1(1318.08,638.37) 1318.08,838.5 1407.55,927.97 1518.97,927.97 1560,969 R721.2@1560,1000 R1032.2@1630,1000
  Bottom Layer w10: R2098.1@1260,650 1306.44,650 v1(1318.08,638.37) 1341.63,638.37 TP510.1@1370,610
BP_FB_ACTION_O: J5.8 R2111.2 TP320.1 | length 2508.3
  Bottom Layer w10: J5.8@180,2285.51 180,2201.97 71.07,2093.05 71.07,711.6 127.68,655 TP320.1@200,655 233.02,621.98 679.51,621.98 711.5,590 R2111.2@910,590
BRIDGE_SHORT: Q152.3 R674.2 R675.1 R1016.2 R1056.1 TP319.1 | length 8664.8
  Top Layer w10: Q152.3@1240,258.5 1279.26,258.5 1327.76,210 1877.31,210 v1(1877.31,216.65) ; v1(1631.05,523.55) 1631.05,529.16 1751.88,650 R674.2@1780,650 R1016.2@1780,750
  Bottom Layer w10: v1(1631.05,523.55) 1631.05,460.5 1781.17,310.38 1781.17,292.57 1858.03,215.72 v1@1877.31,215.72 ; v1(1877.31,216.65) v1@1877.31,215.72 ; R1056.1@8740,600 R675.1@8740,520 8705.43,520 8691,505.57 8691,336.36 8609.64,255 TP319.1@8575,255 8360.51,255 8198.31,92.79 1992.71,92.79 1877.31,208.19 v1@1877.31,215.72
BUS_OVC: J1.31 R2199.1 TP318.1 | length 9569.6
  Top Layer w10: v1(4506.73,4340.74) 4506.73,4263.67 4566.66,4203.74 v1(4580.8,4203.74) ; J1.31@8231.5,8081.5 8186.5,8036.5 8186.5,7962.86 8296.17,7853.19 8485.83,7853.19 8593.68,7745.34 v1(8633.68,7745.34) ; v1(8493.87,4163.72) 8493.87,4193.72 8490.03,4197.56 8490.03,5642.5 8635,5787.47 8904.25,5787.47 9017.5,5900.72 9017.5,7654.5 8899.31,7772.69 8884.68,7772.69 v1(8884.68,7769.92)
  Bottom Layer w10: R2199.1@4390,4440 4390,4399.86 4449.13,4340.74 v1(4506.73,4340.74) ; v1(4580.8,4203.74) 4602.02,4182.53 4602.02,4179.04 4616.06,4165 5218.48,4165 5257.64,4125.85 5313.45,4125.85 5335.53,4147.93 6224.69,4147.93 6319.04,4053.58 6464.15,4053.58 6487.93,4029.8 6968.03,4029.8 7082.12,3915.71 7221.5,3915.71 7263.63,3957.84 7587.09,3957.84 7647.53,4018.28 7713.14,4018.28 7725.87,4031.01 7854.16,4031.01 7882.68,4059.53 8164.48,4059.53 8200.5,4095.55 8202.26,4095.55 8209.09,4102.38 8344.52,4102.38 8397.42,4155.28 8397.42,4169.42 8415,4186.99 8473.73,4186.99 8493.87,4166.86 v1(8493.87,4163.72) ; TP318.1@8230,8080 J1.31@8231.5,8081.5 ; v1(8633.68,7745.34) 8637.14,7745.34 8642.48,7740 8690.55,7740 8759.13,7808.57 8846.03,7808.57 v1(8884.68,7769.92)
BYPASS_V_A: J7.16 R1596.1 TP317.1 | length 6796.7
  Mid Layer 1 w10: J7.16@200,4700 144.63,4700 64.56,4780.07 64.56,7712.91 212.3,7860.66 583.32,7860.66 726.25,8003.58 726.25,8060.79 856.96,8191.5 2855.99,8191.5 2952.36,8095.14 2952.36,7958.66 3026.55,7884.47 v1(3026.55,7819.05)
  Bottom Layer w10: v1(3026.55,7819.05) 3026.55,7837.69 TP317.1@3049.43,7860.57 ; TP317.1@3055,7855 TP317.1@3049.43,7860.57 ; R1596.1@3160,7770 3160,7806.48 3110.93,7855.56 3055.98,7855.56 3050.19,7861.34 TP317.1@3049.43,7860.57
BYPASS_V_B: J7.18 R1597.1 TP511.1 | length 6386.5
  Mid Layer 1 w10: J7.18@200,4800 112.73,4800 84.56,4828.17 84.56,7704.63 220.59,7840.66 591.61,7840.66 746.25,7995.29 746.25,8017.3 746.25,8052.43 864.45,8170.63 2808.99,8170.63 2847.36,8132.26 2847.36,8100.14 2847.36,7962.86 2810,7925.49 v1(2810,7815.01)
  Bottom Layer w10: R1597.1@2810,7770 v1(2810,7815.01)
BYPASS_V_C: J7.20 R1598.1 TP512.1 | length 6920.4
  Mid Layer 2 w10: J7.20@200,4900 103.21,4996.79 103.21,7650.87 307.43,7855.08 544.66,7855.08 866.45,8176.87 2895.44,8176.87 2947.36,8124.95 2947.36,8100.14 2947.36,7962.86 2947.36,7846.07 2967.29,7826.14 v1(2967.29,7821.84)
  Bottom Layer w10: R1598.1@2810,7260 2810,7283.1 2826.01,7299.1 2905.87,7299.1 3008,7401.23 TP512.1@3008,7470 ; v1(2967.29,7821.84) 2967.29,7809.88 2938.32,7780.91 2938.32,7717.11 2955.16,7700.27 2955.16,7616.89 3008,7564.05 TP512.1@3008,7470 ; TP512.1@3005,7470 TP512.1@3008,7470
CAN_Module_H: D58.3 J7.5 L13.2 R1348.2 TP1780.1 | length 1211.8
  Bottom Layer w10: TP1780.1@410,4205 TP1780.1@410,4200 ; D58.3@550,4198.5 D58.3@550,4200 ; L13.2@605,4845.5 568.01,4845.5 511.79,4789.29 511.79,4547.3 385.86,4421.37 385.86,4285.86 J7.5@300,4200 TP1780.1@410,4200 ; R1348.2@650,4285 650,4257.75 625.16,4232.91 564.76,4232.91 550,4218.15 D58.3@550,4200 ; TP1780.1@410,4200 D58.3@550,4200
CAN_Module_L: D57.3 J7.4 L12.2 R1348.1 TP1781.1 | length 2173.9
  Top Layer w10: J7.4@200,4100 250,4150 380.54,4150 421.45,4190.92 v1(421.45,4264.02)
  Bottom Layer w10: 233.01,4133.01 254.77,4154.77 549.9,4154.77 ; v1(421.45,4264.02) 421.45,4403.27 531.79,4513.61 531.79,4780.67 559.41,4808.29 640.07,4808.29 648.5,4816.72 648.5,4822.5 671.5,4845.5 L12.2@715,4845.5 ; D57.3@550,4091.5 549.9,4091.5 549.9,4154.77 ; TP1781.1@775,4625 763.54,4625 763.54,4454.58 703.36,4394.41 703.36,4285 R1348.1@710,4285 710,4253.54 693.59,4237.13 675.01,4237.13 650.09,4212.21 650.09,4187.99 617.22,4155.12 549.9,4155.12 549.9,4154.77
  Bottom Layer w20: J7.4@200,4100 233.01,4133.01
CAN_Monitor_H: D54.3 J5.1 J7.1 R1350.2 R1352.2 TP314.1 | length 2203.1
  Top Layer w10: J5.1@180,2974.49 180,3065.66 91.6,3154.06 91.6,3795.76 163.46,3867.62 248.51,3867.62 300,3919.11 J7.1@300,4000
  Bottom Layer w10: R1350.2@140,3180 140,3091.38 176.38,3055 TP314.1@180,3055 ; J7.1@300,4000 300,3848.56 528.56,3620 R1352.2@640,3620
  Bottom Layer w20: TP314.1@180,3055 J5.1@180,2974.49 300.13,2974.49 314.62,2960 D54.3@368.5,2960
CAN_Monitor_L: D53.3 J5.2 J7.2 R1351.2 R1353.2 TP1782.1 | length 2244.6
  Bottom Layer w10: TP1782.1@120,3805 TP1782.1@110.7,3805 ; J7.2@200,4000 200,3922.17 201.17,3921 ; D53.3@368.5,2810 367.4,2811.1 367.4,2848.25 339.59,2876.06 J5.2@180,2876.06 118.97,2876.06 96.92,2898.1 96.92,3234.66 122.26,3260 R1351.2@140,3260 140,3450 138.38,3450 110.7,3477.68 TP1782.1@110.7,3805 ; R1353.2@720,3620 717.5,3620 717.5,3599.95 692.71,3575.16 541.18,3575.16 201.17,3915.16 201.17,3921 ; TP1782.1@110.7,3805 110.7,3879.09 152.6,3921 201.17,3921
CARRIER_SYNC: C424.1 D76.3 J7.8 R1482.1 R1485.2 TP312.1 | length 2453.2
  Top Layer w10: v1(563.22,6078.73) 552.27,6078.73 551,6080 R1482.1@520,6080 R1485.2@520,6010 520,6000 C424.1@590,6000
  Bottom Layer w10: 167.86,4332.14 136.87,4363.13 136.87,5983.98 147.89,5995 TP312.1@150,5995 204.77,5995 371.27,6161.5 D76.3@430,6161.5 506.23,6161.5 563.22,6104.51 v1(563.22,6078.73)
  Bottom Layer w20: 167.86,4332.14 J7.8@200,4300
CARRIER_SYNC_F: R871.1 R1061.2 R1492.1 TP311.1 | length 5012.8
  Top Layer w10: R871.1@410,6080 R1492.1@410,6000 464.3,6000 v1(464.3,5998.13) ; v1(1401.53,1872.01) 1401.53,1855.42 1548.9,1855.42 1594.31,1810 R1061.2@1630,1810
  Bottom Layer w10: v1(464.3,5998.13) 507.04,5998.13 537.5,5967.67 537.5,5893.37 595.44,5835.44 TP311.1@595,5835 617.11,5835 875.26,5576.85 875.26,5236.39 978.21,5133.44 978.21,2192.85 1299.06,1872.01 v1(1401.53,1872.01)
CHARGER_SCR_DRV: J1.8 R1146.2 TP340.1 | length 606.7
  Bottom Layer w10: 9431.5,7934.14 9431.5,7846.37 9457.86,7820 9560,7820 ; TP340.1@9560,7800 9560,7820 ; R1146.2@9830,7760 9830,7789.49 9799.49,7820 9560,7820
  Bottom Layer w20: 9431.5,7934.14 J1.8@9431.5,7981.5
CHG_OVP: Q18.3 R725.1 R1014.1 TP513.1 | length 456.9
  Top Layer w10: R1014.1@7900,1870 7900,1900.66 7901,1900.66 ; R725.1@7900,1940 7901,1940 7901,1900.66 ; v1(7943.91,2133.96) 7943.91,2082.3 7944.51,2081.7 7944.51,2055.02 7939.73,2050.24 v1(7939.73,1900.66) 7901,1900.66
  Bottom Layer w10: TP513.1@7900,1875 7925.66,1900.66 v1(7939.73,1900.66) ; Q18.3@7930,2188.5 7930,2147.87 v1(7943.91,2133.96)
CPLD_CARRIER_SYNC: R666.2 R1069.2 TP339.1 U30.11 | length 5519.3
  Top Layer w10: U30.11@340,6260 340,6203.39 377.15,6166.24 377.15,5890.15 v1(373.49,5890.15) ; v1(1370.44,1832.91) 1377.62,1832.91 1385.74,1824.79 1510.88,1824.79 1560,1775.66 R666.2@1560,1720 R1069.2@1630,1720
  Bottom Layer w10: v1(373.49,5890.15) 373.49,5878.47 360,5864.98 360,5720 TP339.1@365,5715 397.77,5682.22 465.6,5682.22 555.71,5772.33 648.96,5772.33 853.71,5567.58 853.71,5229.21 958.18,5124.73 958.18,2184.6 1309.87,1832.91 v1(1370.44,1832.91)
CPLD_INV_SYNC: R667.2 R1070.2 TP338.1 U30.1 | length 6190.2
  Top Layer w10: U30.1@490,6460 539.81,6460 v1(539.81,6456.3) ; v1(1238.47,2003.31) 1238.47,1524.12 1180,1465.65 1180,1277.79 1190.62,1267.16 1390.54,1267.16 1408.71,1249 1545.2,1249 1560,1234.2 R667.2@1560,1200 R1070.2@1630,1200
  Bottom Layer w10: v1(539.81,6456.3) 539.81,6460 585,6460 ; TP338.1@585,6480 585,6460 ; v1(1238.47,2003.31) 1229.24,2003.31 1019.18,2213.36 1019.18,6022.84 912.34,6129.68 912.34,6274.34 813.17,6373.51 730.7,6373.51 644.21,6460 585,6460
CPLD_LBS_SYNC: R665.2 R1068.2 TP337.1 U30.5 | length 5632.2
  Top Layer w10: U30.5@290,6460 290,6416.46 298.16,6408.3 578.07,6408.3 v1(585.21,6415.45) ; v1(1364.64,1944.88) 1557.08,1944.88 1560,1941.96 R665.2@1560,1900 R1068.2@1630,1900
  Bottom Layer w10: v1(585.21,6415.45) 652.53,6415.45 705,6362.97 TP337.1@705,6335 ; TP337.1@700,6335 705,6330 TP337.1@705,6335 ; v1(1364.64,1944.88) 1254.47,1944.88 998.25,2201.1 998.25,5996.75 891.21,6103.79 891.21,6266.79 823,6335 TP337.1@705,6335
CPLD_SER_BUS_R: R1309.1 R2724.1 TP336.1 U6.T9 | length 4552.5
  Top Layer w6: 1926.61,1382.2 1928.5,1380.32 U6.T9@2024.72,1380.32
  Top Layer w10: R1309.1@770,5030 800.11,5030 810.11,5040 R2724.1@835,5040 835,5041.4 877.92,5041.4 v1(882.68,5036.64) ; v1(1431.38,1645.05) 1527.87,1548.57 1707.85,1548.57 1874.21,1382.2 1915,1382.2 1926.61,1382.2
  Bottom Layer w10: v1(882.68,5036.64) 905.4,5036.64 916.15,5025.89 916.15,4286.79 874.76,4245.4 874.76,4205.35 895.39,4184.72 895.39,2119.61 TP336.1@1030,1985 1030,1939.15 1291.17,1677.98 1352.5,1677.98 1385.43,1645.05 v1(1431.38,1645.05)
CPLD_SER_BUS_T: R2713.1 R3014.1 TP335.1 U6.R9 | length 3783.7
  Top Layer w6: 1985.72,1401.54 1985.72,1399.38 2045.03,1399.38 U6.R9@2064.09,1380.32
  Top Layer w10: R3014.1@850,4380 850,4291.98 885.65,4256.32 v1(906.87,4235.08) 900.08,4235.08 890,4225 R2713.1@890,4190 ; v1(1452.07,1680.93) 1549.07,1583.93 1700.77,1583.93 1882.5,1402.2 1915,1402.2 1934.9,1402.2 1935.57,1401.54 1985.72,1401.54
  Bottom Layer w10: v1(906.87,4235.08) 905.02,4233.24 905.02,4231.51 916.32,4220.21 916.32,2148.68 TP335.1@1165,1900 1384.07,1680.93 v1(1452.07,1680.93)
CPLD_SER_BUS_T_5V: R2712.2 R3014.2 TP1877.1 U25.1 | length 1203.2
  Top Layer w10: v1(535.74,5089.38) 535.74,5138.92 595,5198.18 U25.1@595,5240 ; R2712.2@790,4440 R3014.2@849.02,4440 ; v1(812.58,4703.88) 828.89,4703.88 853.63,4679.14 853.63,4444.61 R3014.2@849.02,4440 ; R3014.2@850,4440 R3014.2@849.02,4440
  Bottom Layer w10: v1(535.74,5089.38) 620.43,5089.38 657.05,5052.76 811.25,5052.76 852.02,5011.99 852.02,4809.68 825,4782.66 TP1877.1@825,4775 820,4775 820,4711.3 v1(812.58,4703.88)
D1_A: R2354.1 R2672.1 TP1565.1 U147.3 U149.12 | length 2640
  Top Layer w10: U149.12@2270,4270 2270,4221.49 2321.77,4169.72 2321.77,4108.32 v1(2327.46,4102.63) ; U147.3@2920,5300 v1(2920,5221.04) 3053.88,5221.04 v1(3124.53,5291.69)
  Bottom Layer w10: v1(2327.46,4102.63) 2327.46,4105 TP1565.1@2410,4105 2442.78,4072.22 2700.42,4072.22 3154.2,4526 3154.2,4669.49 3152.82,4670.87 3152.82,4672.8 2925,4900.62 2925,5221.04 v1(2920,5221.04) ; v1(3124.53,5291.69) 3190,5357.16 R2672.1@3190,5475 R2354.1@3290,5475
D1_B: R2350.1 R2671.1 TP1758.1 U147.10 U153.5 | length 1155
  Top Layer w10: U153.5@2820,4470 2820,4530.39 2846.64,4557.03 2887.65,4557.03 v1(2887.65,4555.34) ; U147.10@2820,5100 2820,5150 2826.14,5156.14 v1(2826.14,5168.77)
  Bottom Layer w10: v1(2826.14,5168.77) 2905,5089.91 2905,4892.33 2905.21,4892.13 2905.21,4713.33 2896.5,4704.62 2896.5,4593 2888.84,4585.34 2888.84,4555.34 v1(2887.65,4555.34) 2887.65,4534.59 2907.51,4514.73 R2350.1@2950,4514.73 ; TP1758.1@2980,4440 2950,4470 R2350.1@2950,4514.73 ; R2671.1@3050,4525 R2350.1@2950,4525 R2350.1@2950,4514.73
D1_C: R2344.1 R2677.1 TP1567.1 U152.3 U154.12 | length 1996.4
  Top Layer w10: U154.12@1630,4270 1630,4357.35 1670.87,4398.22 v1(1750.56,4398.22) ; v1(2270,5202.29) U152.3@2270,5300 2270,5354.7 2248.55,5376.16 2248.55,5433.76 2281.44,5466.65 v1(2383.76,5466.65)
  Bottom Layer w10: v1(1750.56,4398.22) 1756.46,4398.22 1861.81,4503.56 1861.81,4875.13 1883.04,4896.37 1883.04,5118.35 1909.69,5145 TP1567.1@2110,5145 2212.71,5145 v1(2270,5202.29) ; v1(2383.76,5466.65) 2384,5466.89 2407.89,5466.89 2446,5505 R2677.1@2450,5505 R2344.1@2550,5505
D2_A: R2351.1 R2670.1 TP1568.1 U147.4 U149.8 | length 2290.9
  Top Layer w10: U149.8@2070,4270 2070,4220 2076.13,4213.87 v1(2076.13,4161.1) ; v1(2873.11,5390.16) 2873.11,5353.11 2870,5350 U147.4@2870,5300 2870,5199.93 v1(2881.85,5188.07)
  Bottom Layer w10: v1(2076.13,4161.1) 2169.67,4161.1 2182.9,4174.33 2514.69,4174.33 2627.46,4287.1 2627.46,4671.19 2642.34,4686.07 2642.34,4785.87 2600.76,4827.45 2600.76,5062.69 2723.07,5185 TP1568.1@2755,5185 2799.95,5185 2813.71,5198.77 2838.57,5198.77 2849.26,5188.07 v1(2881.85,5188.07) ; v1(2873.11,5390.16) 2866.04,5390.16 2830,5426.2 R2670.1@2830,5485 R2351.1@2940,5485
D2_B: R2347.1 R2674.1 TP1759.1 U147.11 U153.12 | length 1160.5
  Top Layer w10: v1(2729.52,4340.87) 2759.52,4340.87 2760.11,4340.28 2900.51,4340.28 2920,4320.79 U153.12@2920,4270 ; U147.11@2870,5100 2870,5025.99 v1(2870.34,5025.65)
  Bottom Layer w10: v1(2729.52,4340.87) 2729.52,4430 TP1759.1@2730,4430 2730.92,4430.92 R2347.1@2730.92,4525 ; R2347.1@2730,4525 R2347.1@2730.92,4525 ; v1(2870.34,5025.65) 2866.66,5025.65 2843.94,5002.93 2843.94,4715.35 2876.5,4682.79 2876.5,4601.29 2838.41,4563.2 2838.41,4525 R2674.1@2830,4525 R2347.1@2730.92,4525
D2_C: R2343.1 R2669.1 TP1570.1 U152.4 U154.8 | length 1944.5
  Top Layer w10: U154.8@1430,4270 v1(1430,4340.02) ; v1(2210.89,5199.11) 2220,5208.21 U152.4@2220,5300 2220,5350 2217.14,5352.86 v1(2217.14,5391.59)
  Bottom Layer w10: v1(1430,4340.02) 1430,4380.46 1412.87,4397.6 1412.87,4666 1401.29,4677.58 1401.29,4755.02 1473.74,4827.48 1473.74,4866.68 1573.2,4966.13 1667.43,4966.14 1901.29,5200 TP1570.1@1990,5200 2180,5200 2180.89,5199.11 v1(2210.89,5199.11) ; R2343.1@2130,5505 R2669.1@2240,5505 2240,5431.83 2217.14,5408.97 v1(2217.14,5391.59)
D3_A: R2353.1 R2673.1 TP1571.1 U149.13 U152.10 | length 1706.4
  Top Layer w10: U152.10@2170,5100 2170,5148.03 2190.96,5168.99 2322.97,5168.99 2351.8,5197.82 2476.89,5197.82 2491,5183.71 2491,5166.34 2533.86,5123.48 2533.86,4988.39 2522.5,4977.03 2522.5,4540.04 2446.37,4463.91 2437.87,4463.91 v1(2416.66,4442.69) 2416.66,4381.51 2370.82,4335.68 v1(2320.66,4335.68) 2320.66,4320.66 2320,4320 U149.13@2320,4270
  Bottom Layer w10: v1(2320.66,4335.68) 2325,4331.35 TP1571.1@2325,4275 ; R2353.1@2380,4525 2428.36,4525 ; v1(2416.66,4442.69) 2428.36,4442.69 2428.36,4525 ; R2673.1@2480,4525 2428.36,4525
D3_B: R2349.1 R2668.1 TP1572.1 U151.3 U153.6 | length 2549.1
  Top Layer w10: v1(1630,5232.52) U151.3@1630,5300 1629.42,5300 1629.42,5340.65 1613.07,5357 1601.66,5357 1575.58,5383.08 1575.58,5429.79 1585.58,5439.79 1585.58,5441.02 1603.87,5459.31 v1(1714.59,5459.31) ; v1(2577.46,4391.53) 2577.46,4396.85 2607.46,4396.85 2622.82,4412.21 2764.84,4412.21 2770,4417.37 U153.6@2770,4470
  Bottom Layer w10: v1(1630,5232.52) 1630,5235 1795,5235 TP1572.1@1795,5234.43 ; v1(1714.59,5459.31) 1751.13,5459.31 1770,5478.18 R2668.1@1770,5515 R2349.1@1870,5515 ; TP1572.1@1795,5220 TP1572.1@1795,5234.43 ; v1(2577.46,4391.53) 2534.16,4434.82 2534.16,5112.13 2411.29,5235 1975.5,5235 1974.93,5234.43 TP1572.1@1795,5234.43
D3_C: R2675.1 R2676.1 TP1760.1 U151.10 U154.13 | length 1259.8
  Top Layer w10: U151.10@1530,5100 1536.5,5100 1536.5,5049.92 1556.3,5030.12 v1(1556.3,4906.8) ; U154.13@1680,4270 1680,4310.31 1710.22,4340.53 1791.85,4340.53 1849.02,4397.71 1849.02,4676.22 1835.55,4689.7 v1(1831.81,4689.7)
  Bottom Layer w10: v1(1556.3,4906.8) TP1760.1@1641.97,4906.8 ; TP1760.1@1650,4920 1650,4914.83 TP1760.1@1641.97,4906.8 ; v1(1831.81,4689.7) 1837.48,4689.7 1837.48,4798.65 1811.13,4825 R2676.1@1760,4825 R2675.1@1660,4825 1660,4906.8 TP1760.1@1641.97,4906.8